# EAGLE board Panel (EAGLE 9.2.1), part 1 of 4
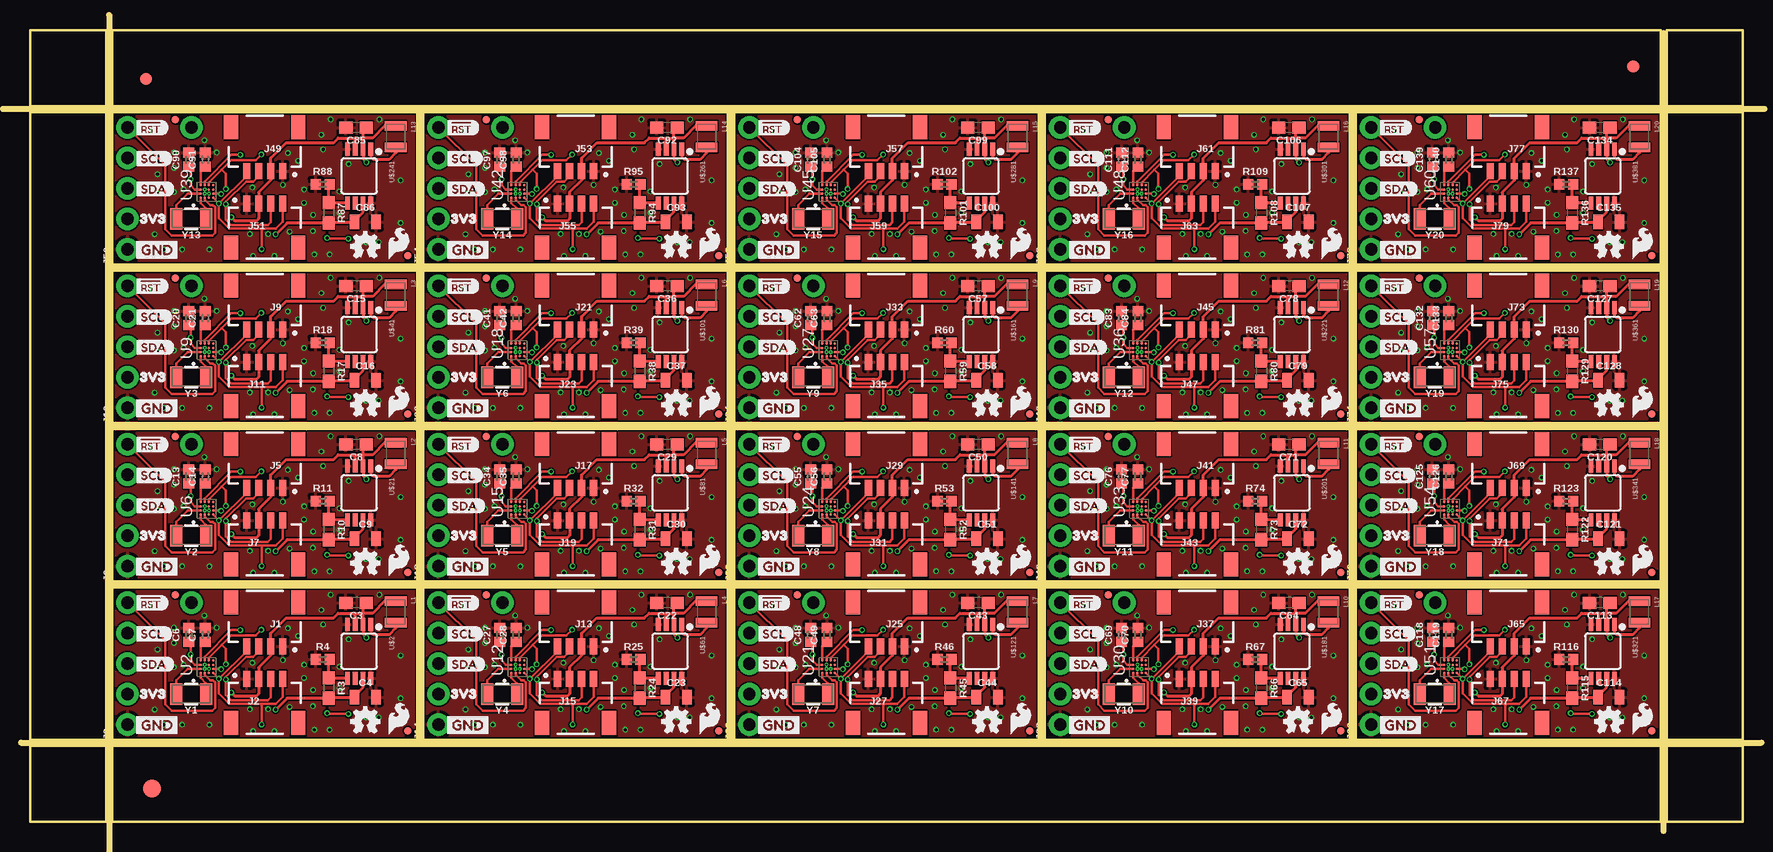
[diagram p0: board, top side]
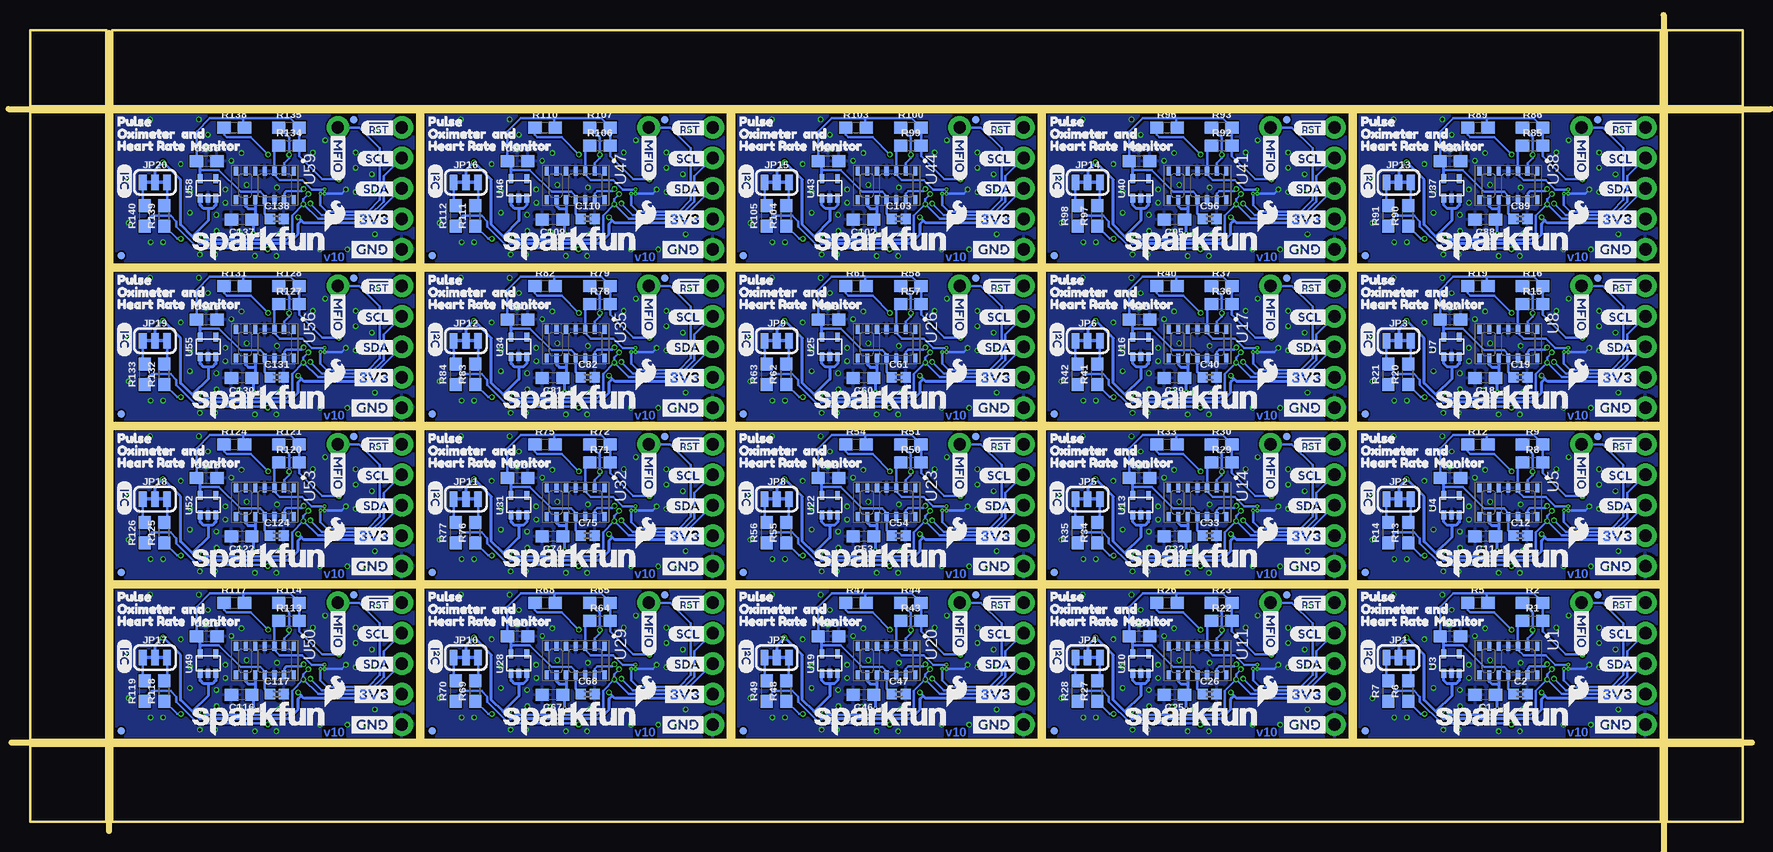
[diagram p1: board, bottom side, seen from below]

Size 142.75 x 66.04 mm. Coordinates in mm from the lower left corner, seen from the top.
Outline: 6.86,6.86 6.86,19.56 32.26,19.56 32.26,6.86 6.86,6.86
Outline: 6.86,20.07 6.86,32.77 32.26,32.77 32.26,20.07 6.86,20.07
Outline: 6.86,33.27 6.86,45.97 32.26,45.97 32.26,33.27 6.86,33.27
Outline: 32.77,6.86 32.77,19.56 58.17,19.56 58.17,6.86 32.77,6.86
Outline: 32.77,20.07 32.77,32.77 58.17,32.77 58.17,20.07 32.77,20.07
Outline: 32.77,33.27 32.77,45.97 58.17,45.97 58.17,33.27 32.77,33.27
Outline: 58.67,6.86 58.67,19.56 84.07,19.56 84.07,6.86 58.67,6.86
Outline: 58.67,20.07 58.67,32.77 84.07,32.77 84.07,20.07 58.67,20.07
Outline: 58.67,33.27 58.67,45.97 84.07,45.97 84.07,33.27 58.67,33.27
Outline: 84.58,6.86 84.58,19.56 109.98,19.56 109.98,6.86 84.58,6.86
Outline: 84.58,20.07 84.58,32.77 109.98,32.77 109.98,20.07 84.58,20.07
Outline: 84.58,33.27 84.58,45.97 109.98,45.97 109.98,33.27 84.58,33.27
Outline: 6.86,46.48 6.86,59.18 32.26,59.18 32.26,46.48 6.86,46.48
Outline: 32.77,46.48 32.77,59.18 58.17,59.18 58.17,46.48 32.77,46.48
Outline: 58.67,46.48 58.67,59.18 84.07,59.18 84.07,46.48 58.67,46.48
Outline: 84.58,46.48 84.58,59.18 109.98,59.18 109.98,46.48 84.58,46.48
Outline: 110.49,6.86 110.49,19.56 135.89,19.56 135.89,6.86 110.49,6.86
Outline: 110.49,20.07 110.49,32.77 135.89,32.77 135.89,20.07 110.49,20.07
Outline: 110.49,33.27 110.49,45.97 135.89,45.97 135.89,33.27 110.49,33.27
Outline: 110.49,46.48 110.49,59.18 135.89,59.18 135.89,46.48 110.49,46.48
Outline: 6.86,6.35 135.89,6.35 135.89,0 6.86,0 6.86,6.35
Outline: 136.4,6.86 136.4,59.18 142.75,59.18 142.75,6.86 136.4,6.86
Outline: 135.89,59.69 6.86,59.69 6.86,66.04 135.89,66.04 135.89,59.69
Outline: 6.35,59.18 6.35,6.86 0,6.86 0,59.18 6.35,59.18
Outline: 0,0 6.35,0 6.35,6.35 0,6.35 0,0
Outline: 136.4,0 142.75,0 142.75,6.35 136.4,6.35 136.4,0
Outline: 142.75,59.69 142.75,66.04 136.4,66.04 136.4,59.69 142.75,59.69
Outline: 6.35,66.04 0,66.04 0,59.69 6.35,59.69 6.35,66.04
Copper layers (1*2*15*16): Top 0.035559375mm / dielectric 0.47751875mm / Route2 0.035559375mm / dielectric 0.47751875mm / Route15 0.035559375mm / dielectric 0.47751875mm / Bottom 0.035559375mm
Design rules "SparkFun-4-layer-FAB-LIMIT *": minimum track width 4mil, minimum drill 6mil, track to track 5mil, track to pad 5mil, pad to pad 5mil, via to via 5mil, smd to smd 5mil, copper to edge 4mil, drill to drill 4mil, minimum pad ring 5mil, minimum via ring 4mil, stop-mask expansion 4mil, vias tented up to drill 25mil, thermal gap 10mil
Milling: 25 lines

## Footprints (pad centres in the part's own frame; a part is rotated, then mirrored left to right if it is on the bottom)
0603 = smd 1.1 x 1: 1 -0.85,0; 2 0.85,0
0402 = smd 0.85 x 0.9: 1 -0.58,0; 2 0.58,0
0805 = smd 0.8 x 1.2: 1 -0.9,0; 2 0.9,0
FIDUCIAL-1X2 = smd 1 x 1: 1 0,0
FIDUCIAL-1.5X3 = smd 1.5 x 1.5: 1 0,0
FIDUCIAL-MICRO = smd 0.635 x 0.635: 1 0,0
JST04_1MM_RA = smd 0.6 x 1.35: 1 -1.5,0; 2 -0.5,0; 3 0.5,0; 4 1.5,0 | smd 1.2 x 2: NC1 2.8,-3.675; NC2 -2.8,-3.675
1X05_NO_SILK = drill 1.016 pad 1.88: 1 0,0; 2 2.54,0; 3 5.08,0; 4 7.62,0; 5 10.16,0
1X01_NO_SILK = drill 1.016 pad 1.88: 1 0,0
SMT-JUMPER_3_2-NC_TRACE_SILK = smd 0.635 x 1.27: 1 -1.016,0; 2 0,0; 3 1.016,0
0806 = smd 0.8 x 1.8: 1 -0.9,0; 2 0.9,0
14_PIN_OESIP = smd 0.75 x 0.35: P1 -1.193,2.409; P2 -1.193,1.609; P3 -1.193,0.809; P4 -1.193,0.009; P5 -1.193,-0.791; P6 -1.193,-1.591; P7 -1.193,-2.391; P8 1.207,-2.391; P9 1.207,-1.591; P10 1.207,-0.791; P11 1.207,0.009; P12 1.207,0.809; P13 1.207,1.609; P14 1.207,2.409
16_PIN_WLP = smd 0.22 x 0.22: 1 -0.532,0.518; 2 -0.182,0.518; 3 0.168,0.518; 4 0.518,0.518; 5 0.518,0.168; 6 0.518,-0.182; 7 0.518,-0.532; 8 0.168,-0.532; 9 -0.182,-0.532; 10 -0.532,-0.532; 11 -0.532,-0.182; 12 -0.532,0.168; 13 -0.182,0.168; 14 0.168,0.168; 15 0.168,-0.182; 16 -0.182,-0.182
SC70 = smd 0.4 x 0.75: 1 -0.65,-0.825; 2 0,-0.825; 3 0.65,-0.825; 4 0.65,0.825; 5 -0.65,0.825
MSOP8 = smd 0.4 x 1.1: 1 -0.975,-2.25; 2 -0.325,-2.25; 3 0.325,-2.25; 4 0.975,-2.25; 5 0.975,2.25; 6 0.325,2.25; 7 -0.325,2.25; 8 -0.975,2.25
CRYSTAL-SMD-3.2X1.5MM = smd 1 x 1.8: P$1 -1.25,0; P$2 1.25,0

## Placement (x,y rotation side)
C1  10uF  [0603]  21.48,10.62 180 bottom
C2  0.1uF  [0402]  18.54,10.67 0 bottom
C3  10uF  [0603]  27.18,18.29 180 top
C4  22uF  [0805]  27.94,10.41 0 top
C5  1.0uF  [0603]  24.38,15.49 0 bottom
C6  1.0uF  [0402]  13.24,15.6 90 top
C7  1.0uF  [0402]  14.61,15.6 90 top
C8  10uF  [0603]  27.18,31.5 180 top
C9  22uF  [0805]  27.94,23.62 0 top
C10  1.0uF  [0603]  24.38,28.7 0 bottom
C11  10uF  [0603]  21.48,23.83 180 bottom
C12  0.1uF  [0402]  18.54,23.88 0 bottom
C13  1.0uF  [0402]  13.24,28.81 90 top
C14  1.0uF  [0402]  14.61,28.8 90 top
C15  10uF  [0603]  27.18,44.7 180 top
C16  22uF  [0805]  27.94,36.83 0 top
C17  1.0uF  [0603]  24.38,41.91 0 bottom
C18  10uF  [0603]  21.48,37.04 180 bottom
C19  0.1uF  [0402]  18.54,37.08 0 bottom
C20  1.0uF  [0402]  13.24,42.02 90 top
C21  1.0uF  [0402]  14.61,42.01 90 top
C22  10uF  [0603]  53.09,18.29 180 top
C23  22uF  [0805]  53.85,10.41 0 top
C24  1.0uF  [0603]  50.29,15.49 0 bottom
C25  10uF  [0603]  47.39,10.62 180 bottom
C26  0.1uF  [0402]  44.45,10.67 0 bottom
C27  1.0uF  [0402]  39.15,15.6 90 top
C28  1.0uF  [0402]  40.51,15.6 90 top
C29  10uF  [0603]  53.09,31.5 180 top
C30  22uF  [0805]  53.85,23.62 0 top
C31  1.0uF  [0603]  50.29,28.7 0 bottom
C32  10uF  [0603]  47.39,23.83 180 bottom
C33  0.1uF  [0402]  44.45,23.88 0 bottom
C34  1.0uF  [0402]  39.15,28.81 90 top
C35  1.0uF  [0402]  40.51,28.8 90 top
C36  10uF  [0603]  53.09,44.7 180 top
C37  22uF  [0805]  53.85,36.83 0 top
C38  1.0uF  [0603]  50.29,41.91 0 bottom
C39  10uF  [0603]  47.39,37.04 180 bottom
C40  0.1uF  [0402]  44.45,37.08 0 bottom
C41  1.0uF  [0402]  39.15,42.02 90 top
C42  1.0uF  [0402]  40.51,42.01 90 top
C43  10uF  [0603]  78.99,18.29 180 top
C44  22uF  [0805]  79.76,10.41 0 top
C45  1.0uF  [0603]  76.2,15.49 0 bottom
C46  10uF  [0603]  73.3,10.62 180 bottom
C47  0.1uF  [0402]  70.36,10.67 0 bottom
C48  1.0uF  [0402]  65.05,15.6 90 top
C49  1.0uF  [0402]  66.42,15.6 90 top
C50  10uF  [0603]  78.99,31.5 180 top
C51  22uF  [0805]  79.76,23.62 0 top
C52  1.0uF  [0603]  76.2,28.7 0 bottom
C53  10uF  [0603]  73.3,23.83 180 bottom
C54  0.1uF  [0402]  70.36,23.88 0 bottom
C55  1.0uF  [0402]  65.05,28.81 90 top
C56  1.0uF  [0402]  66.42,28.8 90 top
C57  10uF  [0603]  78.99,44.7 180 top
C58  22uF  [0805]  79.76,36.83 0 top
C59  1.0uF  [0603]  76.2,41.91 0 bottom
C60  10uF  [0603]  73.3,37.04 180 bottom
C61  0.1uF  [0402]  70.36,37.08 0 bottom
C62  1.0uF  [0402]  65.05,42.02 90 top
C63  1.0uF  [0402]  66.42,42.01 90 top
C64  10uF  [0603]  104.9,18.29 180 top
C65  22uF  [0805]  105.66,10.41 0 top
C66  1.0uF  [0603]  102.11,15.49 0 bottom
C67  10uF  [0603]  99.2,10.62 180 bottom
C68  0.1uF  [0402]  96.27,10.67 0 bottom
C69  1.0uF  [0402]  90.96,15.6 90 top
C70  1.0uF  [0402]  92.33,15.6 90 top
C71  10uF  [0603]  104.9,31.5 180 top
C72  22uF  [0805]  105.66,23.62 0 top
C73  1.0uF  [0603]  102.11,28.7 0 bottom
C74  10uF  [0603]  99.2,23.83 180 bottom
C75  0.1uF  [0402]  96.27,23.88 0 bottom
C76  1.0uF  [0402]  90.96,28.81 90 top
C77  1.0uF  [0402]  92.33,28.8 90 top
C78  10uF  [0603]  104.9,44.7 180 top
C79  22uF  [0805]  105.66,36.83 0 top
C80  1.0uF  [0603]  102.11,41.91 0 bottom
C81  10uF  [0603]  99.2,37.04 180 bottom
C82  0.1uF  [0402]  96.27,37.08 0 bottom
C83  1.0uF  [0402]  90.96,42.02 90 top
C84  1.0uF  [0402]  92.33,42.01 90 top
C85  10uF  [0603]  27.18,57.91 180 top
C86  22uF  [0805]  27.94,50.04 0 top
C87  1.0uF  [0603]  24.38,55.12 0 bottom
C88  10uF  [0603]  21.48,50.24 180 bottom
C89  0.1uF  [0402]  18.54,50.29 0 bottom
C90  1.0uF  [0402]  13.24,55.22 90 top
C91  1.0uF  [0402]  14.61,55.22 90 top
C92  10uF  [0603]  53.09,57.91 180 top
C93  22uF  [0805]  53.85,50.04 0 top
C94  1.0uF  [0603]  50.29,55.12 0 bottom
C95  10uF  [0603]  47.39,50.24 180 bottom
C96  0.1uF  [0402]  44.45,50.29 0 bottom
C97  1.0uF  [0402]  39.15,55.22 90 top
C98  1.0uF  [0402]  40.51,55.22 90 top
C99  10uF  [0603]  78.99,57.91 180 top
C100  22uF  [0805]  79.76,50.04 0 top
C101  1.0uF  [0603]  76.2,55.12 0 bottom
C102  10uF  [0603]  73.3,50.24 180 bottom
C103  0.1uF  [0402]  70.36,50.29 0 bottom
C104  1.0uF  [0402]  65.05,55.22 90 top
C105  1.0uF  [0402]  66.42,55.22 90 top
C106  10uF  [0603]  104.9,57.91 180 top
C107  22uF  [0805]  105.66,50.04 0 top
C108  1.0uF  [0603]  102.11,55.12 0 bottom
C109  10uF  [0603]  99.2,50.24 180 bottom
C110  0.1uF  [0402]  96.27,50.29 0 bottom
C111  1.0uF  [0402]  90.96,55.22 90 top
C112  1.0uF  [0402]  92.33,55.22 90 top
C113  10uF  [0603]  130.81,18.29 180 top
C114  22uF  [0805]  131.57,10.41 0 top
C115  1.0uF  [0603]  128.02,15.49 0 bottom
C116  10uF  [0603]  125.11,10.62 180 bottom
C117  0.1uF  [0402]  122.17,10.67 0 bottom
C118  1.0uF  [0402]  116.87,15.6 90 top
C119  1.0uF  [0402]  118.24,15.6 90 top
C120  10uF  [0603]  130.81,31.5 180 top
C121  22uF  [0805]  131.57,23.62 0 top
C122  1.0uF  [0603]  128.02,28.7 0 bottom
C123  10uF  [0603]  125.11,23.83 180 bottom
C124  0.1uF  [0402]  122.17,23.88 0 bottom
C125  1.0uF  [0402]  116.87,28.81 90 top
C126  1.0uF  [0402]  118.24,28.8 90 top
C127  10uF  [0603]  130.81,44.7 180 top
C128  22uF  [0805]  131.57,36.83 0 top
C129  1.0uF  [0603]  128.02,41.91 0 bottom
C130  10uF  [0603]  125.11,37.04 180 bottom
C131  0.1uF  [0402]  122.17,37.08 0 bottom
C132  1.0uF  [0402]  116.87,42.02 90 top
C133  1.0uF  [0402]  118.24,42.01 90 top
C134  10uF  [0603]  130.81,57.91 180 top
C135  22uF  [0805]  131.57,50.04 0 top
C136  1.0uF  [0603]  128.02,55.12 0 bottom
C137  10uF  [0603]  125.11,50.24 180 bottom
C138  0.1uF  [0402]  122.17,50.29 0 bottom
C139  1.0uF  [0402]  116.87,55.22 90 top
C140  1.0uF  [0402]  118.24,55.22 90 top
E$1  [FIDUCIAL-1X2]  9.65,61.98 0 top
E$2  [FIDUCIAL-1X2]  133.6,62.99 0 top
E$3  [FIDUCIAL-1.5X3]  10.16,2.79 0 top
FD1  FIDUCIALUFIDUCIAL  [FIDUCIAL-MICRO]  12.12,18.94 0 bottom
FD2  FIDUCIALUFIDUCIAL  [FIDUCIAL-MICRO]  12.12,18.94 0 top
FD3  FIDUCIALUFIDUCIAL  [FIDUCIAL-MICRO]  31.5,7.62 0 bottom
FD4  FIDUCIALUFIDUCIAL  [FIDUCIAL-MICRO]  31.5,7.62 0 top
FD5  FIDUCIALUFIDUCIAL  [FIDUCIAL-MICRO]  12.12,32.15 0 bottom
FD6  FIDUCIALUFIDUCIAL  [FIDUCIAL-MICRO]  12.12,32.15 0 top
FD7  FIDUCIALUFIDUCIAL  [FIDUCIAL-MICRO]  31.5,20.83 0 bottom
FD8  FIDUCIALUFIDUCIAL  [FIDUCIAL-MICRO]  31.5,20.83 0 top
FD9  FIDUCIALUFIDUCIAL  [FIDUCIAL-MICRO]  12.12,45.36 0 bottom
FD10  FIDUCIALUFIDUCIAL  [FIDUCIAL-MICRO]  12.12,45.36 0 top
FD11  FIDUCIALUFIDUCIAL  [FIDUCIAL-MICRO]  31.5,34.04 0 bottom
FD12  FIDUCIALUFIDUCIAL  [FIDUCIAL-MICRO]  31.5,34.04 0 top
FD13  FIDUCIALUFIDUCIAL  [FIDUCIAL-MICRO]  38.03,18.94 0 bottom
FD14  FIDUCIALUFIDUCIAL  [FIDUCIAL-MICRO]  38.03,18.94 0 top
FD15  FIDUCIALUFIDUCIAL  [FIDUCIAL-MICRO]  57.4,7.62 0 bottom
FD16  FIDUCIALUFIDUCIAL  [FIDUCIAL-MICRO]  57.4,7.62 0 top
FD17  FIDUCIALUFIDUCIAL  [FIDUCIAL-MICRO]  38.03,32.15 0 bottom
FD18  FIDUCIALUFIDUCIAL  [FIDUCIAL-MICRO]  38.03,32.15 0 top
FD19  FIDUCIALUFIDUCIAL  [FIDUCIAL-MICRO]  57.4,20.83 0 bottom
FD20  FIDUCIALUFIDUCIAL  [FIDUCIAL-MICRO]  57.4,20.83 0 top
FD21  FIDUCIALUFIDUCIAL  [FIDUCIAL-MICRO]  38.03,45.36 0 bottom
FD22  FIDUCIALUFIDUCIAL  [FIDUCIAL-MICRO]  38.03,45.36 0 top
FD23  FIDUCIALUFIDUCIAL  [FIDUCIAL-MICRO]  57.4,34.04 0 bottom
FD24  FIDUCIALUFIDUCIAL  [FIDUCIAL-MICRO]  57.4,34.04 0 top
FD25  FIDUCIALUFIDUCIAL  [FIDUCIAL-MICRO]  63.94,18.94 0 bottom
FD26  FIDUCIALUFIDUCIAL  [FIDUCIAL-MICRO]  63.94,18.94 0 top
FD27  FIDUCIALUFIDUCIAL  [FIDUCIAL-MICRO]  83.31,7.62 0 bottom
FD28  FIDUCIALUFIDUCIAL  [FIDUCIAL-MICRO]  83.31,7.62 0 top
FD29  FIDUCIALUFIDUCIAL  [FIDUCIAL-MICRO]  63.94,32.15 0 bottom
FD30  FIDUCIALUFIDUCIAL  [FIDUCIAL-MICRO]  63.94,32.15 0 top
FD31  FIDUCIALUFIDUCIAL  [FIDUCIAL-MICRO]  83.31,20.83 0 bottom
FD32  FIDUCIALUFIDUCIAL  [FIDUCIAL-MICRO]  83.31,20.83 0 top
FD33  FIDUCIALUFIDUCIAL  [FIDUCIAL-MICRO]  63.94,45.36 0 bottom
FD34  FIDUCIALUFIDUCIAL  [FIDUCIAL-MICRO]  63.94,45.36 0 top
FD35  FIDUCIALUFIDUCIAL  [FIDUCIAL-MICRO]  83.31,34.04 0 bottom
FD36  FIDUCIALUFIDUCIAL  [FIDUCIAL-MICRO]  83.31,34.04 0 top
FD37  FIDUCIALUFIDUCIAL  [FIDUCIAL-MICRO]  89.84,18.94 0 bottom
FD38  FIDUCIALUFIDUCIAL  [FIDUCIAL-MICRO]  89.85,18.94 0 top
FD39  FIDUCIALUFIDUCIAL  [FIDUCIAL-MICRO]  109.22,7.62 0 bottom
FD40  FIDUCIALUFIDUCIAL  [FIDUCIAL-MICRO]  109.22,7.62 0 top
FD41  FIDUCIALUFIDUCIAL  [FIDUCIAL-MICRO]  89.84,32.15 0 bottom
FD42  FIDUCIALUFIDUCIAL  [FIDUCIAL-MICRO]  89.85,32.15 0 top
FD43  FIDUCIALUFIDUCIAL  [FIDUCIAL-MICRO]  109.22,20.83 0 bottom
FD44  FIDUCIALUFIDUCIAL  [FIDUCIAL-MICRO]  109.22,20.83 0 top
FD45  FIDUCIALUFIDUCIAL  [FIDUCIAL-MICRO]  89.84,45.36 0 bottom
FD46  FIDUCIALUFIDUCIAL  [FIDUCIAL-MICRO]  89.85,45.36 0 top
FD47  FIDUCIALUFIDUCIAL  [FIDUCIAL-MICRO]  109.22,34.04 0 bottom
FD48  FIDUCIALUFIDUCIAL  [FIDUCIAL-MICRO]  109.22,34.04 0 top
FD49  FIDUCIALUFIDUCIAL  [FIDUCIAL-MICRO]  12.12,58.56 0 bottom
FD50  FIDUCIALUFIDUCIAL  [FIDUCIAL-MICRO]  12.12,58.56 0 top
FD51  FIDUCIALUFIDUCIAL  [FIDUCIAL-MICRO]  31.5,47.24 0 bottom
FD52  FIDUCIALUFIDUCIAL  [FIDUCIAL-MICRO]  31.5,47.24 0 top
FD53  FIDUCIALUFIDUCIAL  [FIDUCIAL-MICRO]  38.03,58.56 0 bottom
FD54  FIDUCIALUFIDUCIAL  [FIDUCIAL-MICRO]  38.03,58.56 0 top
FD55  FIDUCIALUFIDUCIAL  [FIDUCIAL-MICRO]  57.4,47.24 0 bottom
FD56  FIDUCIALUFIDUCIAL  [FIDUCIAL-MICRO]  57.4,47.24 0 top
FD57  FIDUCIALUFIDUCIAL  [FIDUCIAL-MICRO]  63.94,58.56 0 bottom
FD58  FIDUCIALUFIDUCIAL  [FIDUCIAL-MICRO]  63.94,58.56 0 top
FD59  FIDUCIALUFIDUCIAL  [FIDUCIAL-MICRO]  83.31,47.24 0 bottom
FD60  FIDUCIALUFIDUCIAL  [FIDUCIAL-MICRO]  83.31,47.24 0 top
FD61  FIDUCIALUFIDUCIAL  [FIDUCIAL-MICRO]  89.84,58.56 0 bottom
FD62  FIDUCIALUFIDUCIAL  [FIDUCIAL-MICRO]  89.85,58.56 0 top
FD63  FIDUCIALUFIDUCIAL  [FIDUCIAL-MICRO]  109.22,47.24 0 bottom
FD64  FIDUCIALUFIDUCIAL  [FIDUCIAL-MICRO]  109.22,47.24 0 top
FD65  FIDUCIALUFIDUCIAL  [FIDUCIAL-MICRO]  115.75,18.94 0 bottom
FD66  FIDUCIALUFIDUCIAL  [FIDUCIAL-MICRO]  115.76,18.94 0 top
FD67  FIDUCIALUFIDUCIAL  [FIDUCIAL-MICRO]  135.13,7.62 0 bottom
FD68  FIDUCIALUFIDUCIAL  [FIDUCIAL-MICRO]  135.13,7.62 0 top
FD69  FIDUCIALUFIDUCIAL  [FIDUCIAL-MICRO]  115.75,32.15 0 bottom
FD70  FIDUCIALUFIDUCIAL  [FIDUCIAL-MICRO]  115.76,32.15 0 top
FD71  FIDUCIALUFIDUCIAL  [FIDUCIAL-MICRO]  135.13,20.83 0 bottom
FD72  FIDUCIALUFIDUCIAL  [FIDUCIAL-MICRO]  135.13,20.83 0 top
FD73  FIDUCIALUFIDUCIAL  [FIDUCIAL-MICRO]  115.75,45.36 0 bottom
FD74  FIDUCIALUFIDUCIAL  [FIDUCIAL-MICRO]  115.76,45.36 0 top
FD75  FIDUCIALUFIDUCIAL  [FIDUCIAL-MICRO]  135.13,34.04 0 bottom
FD76  FIDUCIALUFIDUCIAL  [FIDUCIAL-MICRO]  135.13,34.04 0 top
FD77  FIDUCIALUFIDUCIAL  [FIDUCIAL-MICRO]  115.75,58.56 0 bottom
FD78  FIDUCIALUFIDUCIAL  [FIDUCIAL-MICRO]  115.76,58.56 0 top
FD79  FIDUCIALUFIDUCIAL  [FIDUCIAL-MICRO]  135.13,47.24 0 bottom
FD80  FIDUCIALUFIDUCIAL  [FIDUCIAL-MICRO]  135.13,47.24 0 top
J1  [JST04_1MM_RA]  19.56,14.66 180 top
J2  [JST04_1MM_RA]  19.56,11.94 0 top
J3  [1X05_NO_SILK]  8.13,8.13 90 top
J4  [1X01_NO_SILK]  13.46,18.29 0 top
J5  [JST04_1MM_RA]  19.56,27.86 180 top
J6  [1X05_NO_SILK]  8.13,21.34 90 top
J7  [JST04_1MM_RA]  19.56,25.15 0 top
J8  [1X01_NO_SILK]  13.46,31.5 0 top
J9  [JST04_1MM_RA]  19.56,41.07 180 top
J10  [1X05_NO_SILK]  8.13,34.54 90 top
J11  [JST04_1MM_RA]  19.56,38.35 0 top
J12  [1X01_NO_SILK]  13.46,44.7 0 top
J13  [JST04_1MM_RA]  45.47,14.66 180 top
J14  [1X05_NO_SILK]  34.04,8.13 90 top
J15  [JST04_1MM_RA]  45.47,11.94 0 top
J16  [1X01_NO_SILK]  39.37,18.29 0 top
J17  [JST04_1MM_RA]  45.47,27.86 180 top
J18  [1X05_NO_SILK]  34.04,21.34 90 top
J19  [JST04_1MM_RA]  45.47,25.15 0 top
J20  [1X01_NO_SILK]  39.37,31.5 0 top
J21  [JST04_1MM_RA]  45.47,41.07 180 top
J22  [1X05_NO_SILK]  34.04,34.54 90 top
J23  [JST04_1MM_RA]  45.47,38.35 0 top
J24  [1X01_NO_SILK]  39.37,44.7 0 top
J25  [JST04_1MM_RA]  71.37,14.66 180 top
J26  [1X05_NO_SILK]  59.94,8.13 90 top
J27  [JST04_1MM_RA]  71.37,11.94 0 top
J28  [1X01_NO_SILK]  65.28,18.29 0 top
J29  [JST04_1MM_RA]  71.37,27.86 180 top
J30  [1X05_NO_SILK]  59.94,21.34 90 top
J31  [JST04_1MM_RA]  71.37,25.15 0 top
J32  [1X01_NO_SILK]  65.28,31.5 0 top
J33  [JST04_1MM_RA]  71.37,41.07 180 top
J34  [1X05_NO_SILK]  59.94,34.54 90 top
J35  [JST04_1MM_RA]  71.37,38.35 0 top
J36  [1X01_NO_SILK]  65.28,44.7 0 top
J37  [JST04_1MM_RA]  97.28,14.66 180 top
J38  [1X05_NO_SILK]  85.85,8.13 90 top
J39  [JST04_1MM_RA]  97.28,11.94 0 top
J40  [1X01_NO_SILK]  91.19,18.29 0 top
J41  [JST04_1MM_RA]  97.28,27.86 180 top
J42  [1X05_NO_SILK]  85.85,21.34 90 top
J43  [JST04_1MM_RA]  97.28,25.15 0 top
J44  [1X01_NO_SILK]  91.19,31.5 0 top
J45  [JST04_1MM_RA]  97.28,41.07 180 top
J46  [1X05_NO_SILK]  85.85,34.54 90 top
J47  [JST04_1MM_RA]  97.28,38.35 0 top
J48  [1X01_NO_SILK]  91.19,44.7 0 top
J49  [JST04_1MM_RA]  19.56,54.28 180 top
J50  [1X05_NO_SILK]  8.13,47.75 90 top
J51  [JST04_1MM_RA]  19.56,51.56 0 top
J52  [1X01_NO_SILK]  13.46,57.91 0 top
J53  [JST04_1MM_RA]  45.47,54.28 180 top
J54  [1X05_NO_SILK]  34.04,47.75 90 top
J55  [JST04_1MM_RA]  45.47,51.56 0 top
J56  [1X01_NO_SILK]  39.37,57.91 0 top
J57  [JST04_1MM_RA]  71.37,54.28 180 top
J58  [1X05_NO_SILK]  59.94,47.75 90 top
J59  [JST04_1MM_RA]  71.37,51.56 0 top
J60  [1X01_NO_SILK]  65.28,57.91 0 top
J61  [JST04_1MM_RA]  97.28,54.28 180 top
J62  [1X05_NO_SILK]  85.85,47.75 90 top
J63  [JST04_1MM_RA]  97.28,51.56 0 top
J64  [1X01_NO_SILK]  91.19,57.91 0 top
J65  [JST04_1MM_RA]  123.19,14.66 180 top
J66  [1X05_NO_SILK]  111.76,8.13 90 top
J67  [JST04_1MM_RA]  123.19,11.94 0 top
J68  [1X01_NO_SILK]  117.09,18.29 0 top
J69  [JST04_1MM_RA]  123.19,27.86 180 top
J70  [1X05_NO_SILK]  111.76,21.34 90 top
J71  [JST04_1MM_RA]  123.19,25.15 0 top
J72  [1X01_NO_SILK]  117.09,31.5 0 top
J73  [JST04_1MM_RA]  123.19,41.07 180 top
J74  [1X05_NO_SILK]  111.76,34.54 90 top
J75  [JST04_1MM_RA]  123.19,38.35 0 top
J76  [1X01_NO_SILK]  117.09,44.7 0 top
J77  [JST04_1MM_RA]  123.19,54.28 180 top
J78  [1X05_NO_SILK]  111.76,47.75 90 top
J79  [JST04_1MM_RA]  123.19,51.56 0 top
J80  [1X01_NO_SILK]  117.09,57.91 0 top
JP1  JUMPER-SMT_3_2-NC_TRACE_SILK  [SMT-JUMPER_3_2-NC_TRACE_SILK]  28.7,13.72 0 bottom
JP2  JUMPER-SMT_3_2-NC_TRACE_SILK  [SMT-JUMPER_3_2-NC_TRACE_SILK]  28.7,26.92 0 bottom
JP3  JUMPER-SMT_3_2-NC_TRACE_SILK  [SMT-JUMPER_3_2-NC_TRACE_SILK]  28.7,40.13 0 bottom
JP4  JUMPER-SMT_3_2-NC_TRACE_SILK  [SMT-JUMPER_3_2-NC_TRACE_SILK]  54.61,13.72 0 bottom
JP5  JUMPER-SMT_3_2-NC_TRACE_SILK  [SMT-JUMPER_3_2-NC_TRACE_SILK]  54.61,26.92 0 bottom
JP6  JUMPER-SMT_3_2-NC_TRACE_SILK  [SMT-JUMPER_3_2-NC_TRACE_SILK]  54.61,40.13 0 bottom
JP7  JUMPER-SMT_3_2-NC_TRACE_SILK  [SMT-JUMPER_3_2-NC_TRACE_SILK]  80.52,13.72 0 bottom
JP8  JUMPER-SMT_3_2-NC_TRACE_SILK  [SMT-JUMPER_3_2-NC_TRACE_SILK]  80.52,26.92 0 bottom
JP9  JUMPER-SMT_3_2-NC_TRACE_SILK  [SMT-JUMPER_3_2-NC_TRACE_SILK]  80.52,40.13 0 bottom
JP10  JUMPER-SMT_3_2-NC_TRACE_SILK  [SMT-JUMPER_3_2-NC_TRACE_SILK]  106.43,13.72 0 bottom
JP11  JUMPER-SMT_3_2-NC_TRACE_SILK  [SMT-JUMPER_3_2-NC_TRACE_SILK]  106.43,26.92 0 bottom
JP12  JUMPER-SMT_3_2-NC_TRACE_SILK  [SMT-JUMPER_3_2-NC_TRACE_SILK]  106.43,40.13 0 bottom
JP13  JUMPER-SMT_3_2-NC_TRACE_SILK  [SMT-JUMPER_3_2-NC_TRACE_SILK]  28.7,53.34 0 bottom
JP14  JUMPER-SMT_3_2-NC_TRACE_SILK  [SMT-JUMPER_3_2-NC_TRACE_SILK]  54.61,53.34 0 bottom
JP15  JUMPER-SMT_3_2-NC_TRACE_SILK  [SMT-JUMPER_3_2-NC_TRACE_SILK]  80.52,53.34 0 bottom
JP16  JUMPER-SMT_3_2-NC_TRACE_SILK  [SMT-JUMPER_3_2-NC_TRACE_SILK]  106.43,53.34 0 bottom
JP17  JUMPER-SMT_3_2-NC_TRACE_SILK  [SMT-JUMPER_3_2-NC_TRACE_SILK]  132.33,13.72 0 bottom
JP18  JUMPER-SMT_3_2-NC_TRACE_SILK  [SMT-JUMPER_3_2-NC_TRACE_SILK]  132.33,26.92 0 bottom
JP19  JUMPER-SMT_3_2-NC_TRACE_SILK  [SMT-JUMPER_3_2-NC_TRACE_SILK]  132.33,40.13 0 bottom
JP20  JUMPER-SMT_3_2-NC_TRACE_SILK  [SMT-JUMPER_3_2-NC_TRACE_SILK]  132.33,53.34 0 bottom
L1  2.2μH  [0806]  30.48,17.53 270 top
L2  2.2μH  [0806]  30.48,30.73 270 top
L3  2.2μH  [0806]  30.48,43.94 270 top
L4  2.2μH  [0806]  56.39,17.53 270 top
L5  2.2μH  [0806]  56.39,30.73 270 top
L6  2.2μH  [0806]  56.39,43.94 270 top
L7  2.2μH  [0806]  82.3,17.53 270 top
L8  2.2μH  [0806]  82.3,30.73 270 top
L9  2.2μH  [0806]  82.3,43.94 270 top
L10  2.2μH  [0806]  108.2,17.53 270 top
L11  2.2μH  [0806]  108.2,30.73 270 top
L12  2.2μH  [0806]  108.2,43.94 270 top
L13  2.2μH  [0806]  30.48,57.15 270 top
L14  2.2μH  [0806]  56.39,57.15 270 top
L15  2.2μH  [0806]  82.3,57.15 270 top
L16  2.2μH  [0806]  108.2,57.15 270 top
L17  2.2μH  [0806]  134.11,17.53 270 top
L18  2.2μH  [0806]  134.11,30.73 270 top
L19  2.2μH  [0806]  134.11,43.94 270 top
L20  2.2μH  [0806]  134.11,57.15 270 top
LOGO1  SFE_LOGO_FLAME.1_INCH  [SFE_LOGO_FLAME_.1]  30.73,8.64 0 top
LOGO2  OSHW-LOGOMINI  [OSHW-LOGO-MINI]  27.94,8.38 0 top
LOGO3  SFE_LOGO_NAME.1_INCH  [SFE_LOGO_NAME_.1]  20.07,8.64 0 bottom
LOGO4  SFE_LOGO_FLAME.1_INCH  [SFE_LOGO_FLAME_.1]  30.73,21.84 0 top
LOGO5  OSHW-LOGOMINI  [OSHW-LOGO-MINI]  27.94,21.59 0 top
LOGO6  SFE_LOGO_NAME.1_INCH  [SFE_LOGO_NAME_.1]  20.07,21.84 0 bottom
LOGO7  SFE_LOGO_FLAME.1_INCH  [SFE_LOGO_FLAME_.1]  30.73,35.05 0 top
LOGO8  OSHW-LOGOMINI  [OSHW-LOGO-MINI]  27.94,34.8 0 top
LOGO9  SFE_LOGO_NAME.1_INCH  [SFE_LOGO_NAME_.1]  20.07,35.05 0 bottom
LOGO10  SFE_LOGO_FLAME.1_INCH  [SFE_LOGO_FLAME_.1]  56.64,8.64 0 top
LOGO11  OSHW-LOGOMINI  [OSHW-LOGO-MINI]  53.85,8.38 0 top
LOGO12  SFE_LOGO_NAME.1_INCH  [SFE_LOGO_NAME_.1]  45.97,8.64 0 bottom
LOGO13  SFE_LOGO_FLAME.1_INCH  [SFE_LOGO_FLAME_.1]  56.64,21.84 0 top
LOGO14  OSHW-LOGOMINI  [OSHW-LOGO-MINI]  53.85,21.59 0 top
LOGO15  SFE_LOGO_NAME.1_INCH  [SFE_LOGO_NAME_.1]  45.97,21.84 0 bottom
LOGO16  SFE_LOGO_FLAME.1_INCH  [SFE_LOGO_FLAME_.1]  56.64,35.05 0 top
LOGO17  OSHW-LOGOMINI  [OSHW-LOGO-MINI]  53.85,34.8 0 top
LOGO18  SFE_LOGO_NAME.1_INCH  [SFE_LOGO_NAME_.1]  45.97,35.05 0 bottom
LOGO19  SFE_LOGO_FLAME.1_INCH  [SFE_LOGO_FLAME_.1]  82.55,8.64 0 top
LOGO20  OSHW-LOGOMINI  [OSHW-LOGO-MINI]  79.76,8.38 0 top
LOGO21  SFE_LOGO_NAME.1_INCH  [SFE_LOGO_NAME_.1]  71.88,8.64 0 bottom
LOGO22  SFE_LOGO_FLAME.1_INCH  [SFE_LOGO_FLAME_.1]  82.55,21.84 0 top
LOGO23  OSHW-LOGOMINI  [OSHW-LOGO-MINI]  79.76,21.59 0 top
LOGO24  SFE_LOGO_NAME.1_INCH  [SFE_LOGO_NAME_.1]  71.88,21.84 0 bottom
LOGO25  SFE_LOGO_FLAME.1_INCH  [SFE_LOGO_FLAME_.1]  82.55,35.05 0 top
LOGO26  OSHW-LOGOMINI  [OSHW-LOGO-MINI]  79.76,34.8 0 top
LOGO27  SFE_LOGO_NAME.1_INCH  [SFE_LOGO_NAME_.1]  71.88,35.05 0 bottom
LOGO28  SFE_LOGO_FLAME.1_INCH  [SFE_LOGO_FLAME_.1]  108.46,8.64 0 top
LOGO29  OSHW-LOGOMINI  [OSHW-LOGO-MINI]  105.66,8.38 0 top
LOGO30  SFE_LOGO_NAME.1_INCH  [SFE_LOGO_NAME_.1]  97.79,8.64 0 bottom
LOGO31  SFE_LOGO_FLAME.1_INCH  [SFE_LOGO_FLAME_.1]  108.46,21.84 0 top
LOGO32  OSHW-LOGOMINI  [OSHW-LOGO-MINI]  105.66,21.59 0 top
LOGO33  SFE_LOGO_NAME.1_INCH  [SFE_LOGO_NAME_.1]  97.79,21.84 0 bottom
LOGO34  SFE_LOGO_FLAME.1_INCH  [SFE_LOGO_FLAME_.1]  108.46,35.05 0 top
LOGO35  OSHW-LOGOMINI  [OSHW-LOGO-MINI]  105.66,34.8 0 top
LOGO36  SFE_LOGO_NAME.1_INCH  [SFE_LOGO_NAME_.1]  97.79,35.05 0 bottom
LOGO37  SFE_LOGO_FLAME.1_INCH  [SFE_LOGO_FLAME_.1]  30.73,48.26 0 top
LOGO38  OSHW-LOGOMINI  [OSHW-LOGO-MINI]  27.94,48.01 0 top
LOGO39  SFE_LOGO_NAME.1_INCH  [SFE_LOGO_NAME_.1]  20.07,48.26 0 bottom
LOGO40  SFE_LOGO_FLAME.1_INCH  [SFE_LOGO_FLAME_.1]  56.64,48.26 0 top
LOGO41  OSHW-LOGOMINI  [OSHW-LOGO-MINI]  53.85,48.01 0 top
LOGO42  SFE_LOGO_NAME.1_INCH  [SFE_LOGO_NAME_.1]  45.97,48.26 0 bottom
LOGO43  SFE_LOGO_FLAME.1_INCH  [SFE_LOGO_FLAME_.1]  82.55,48.26 0 top
LOGO44  OSHW-LOGOMINI  [OSHW-LOGO-MINI]  79.76,48.01 0 top
LOGO45  SFE_LOGO_NAME.1_INCH  [SFE_LOGO_NAME_.1]  71.88,48.26 0 bottom
LOGO46  SFE_LOGO_FLAME.1_INCH  [SFE_LOGO_FLAME_.1]  108.46,48.26 0 top
LOGO47  OSHW-LOGOMINI  [OSHW-LOGO-MINI]  105.66,48.01 0 top
LOGO48  SFE_LOGO_NAME.1_INCH  [SFE_LOGO_NAME_.1]  97.79,48.26 0 bottom
LOGO49  SFE_LOGO_FLAME.1_INCH  [SFE_LOGO_FLAME_.1]  134.37,8.64 0 top
LOGO50  OSHW-LOGOMINI  [OSHW-LOGO-MINI]  131.57,8.38 0 top
LOGO51  SFE_LOGO_NAME.1_INCH  [SFE_LOGO_NAME_.1]  123.7,8.64 0 bottom
LOGO52  SFE_LOGO_FLAME.1_INCH  [SFE_LOGO_FLAME_.1]  134.37,21.84 0 top
LOGO53  OSHW-LOGOMINI  [OSHW-LOGO-MINI]  131.57,21.59 0 top
LOGO54  SFE_LOGO_NAME.1_INCH  [SFE_LOGO_NAME_.1]  123.7,21.84 0 bottom
LOGO55  SFE_LOGO_FLAME.1_INCH  [SFE_LOGO_FLAME_.1]  134.37,35.05 0 top
LOGO56  OSHW-LOGOMINI  [OSHW-LOGO-MINI]  131.57,34.8 0 top
LOGO57  SFE_LOGO_NAME.1_INCH  [SFE_LOGO_NAME_.1]  123.7,35.05 0 bottom
LOGO58  SFE_LOGO_FLAME.1_INCH  [SFE_LOGO_FLAME_.1]  134.37,48.26 0 top
LOGO59  OSHW-LOGOMINI  [OSHW-LOGO-MINI]  131.57,48.01 0 top
LOGO60  SFE_LOGO_NAME.1_INCH  [SFE_LOGO_NAME_.1]  123.7,48.26 0 bottom
R1  4.7k  [0603]  17.53,16.76 0 bottom
R2  4.7k  [0603]  17.53,18.29 0 bottom
R3  750K  [0603]  24.89,11.18 270 top
R4  100K  [0402]  24.39,13.55 0 top
R5  4.7k  [0603]  22.1,18.29 0 bottom
R6  4.7k  [0603]  27.91,10.92 90 bottom
R7  4.7k  [0603]  29.54,10.92 90 bottom
R8  4.7k  [0603]  17.53,29.97 0 bottom
R9  4.7k  [0603]  17.53,31.5 0 bottom
R10  750K  [0603]  24.89,24.38 270 top
R11  100K  [0402]  24.39,26.76 0 top
R12  4.7k  [0603]  22.1,31.5 0 bottom
R13  4.7k  [0603]  27.91,24.13 90 bottom
R14  4.7k  [0603]  29.54,24.13 90 bottom
R15  4.7k  [0603]  17.53,43.18 0 bottom
R16  4.7k  [0603]  17.53,44.7 0 bottom
R17  750K  [0603]  24.89,37.59 270 top
R18  100K  [0402]  24.39,39.96 0 top
R19  4.7k  [0603]  22.1,44.7 0 bottom
R20  4.7k  [0603]  27.91,37.34 90 bottom
R21  4.7k  [0603]  29.54,37.34 90 bottom
R22  4.7k  [0603]  43.43,16.76 0 bottom
R23  4.7k  [0603]  43.43,18.29 0 bottom
R24  750K  [0603]  50.8,11.18 270 top
R25  100K  [0402]  50.3,13.55 0 top
R26  4.7k  [0603]  48.01,18.29 0 bottom
R27  4.7k  [0603]  53.82,10.92 90 bottom
R28  4.7k  [0603]  55.45,10.92 90 bottom
R29  4.7k  [0603]  43.43,29.97 0 bottom
R30  4.7k  [0603]  43.43,31.5 0 bottom
R31  750K  [0603]  50.8,24.38 270 top
R32  100K  [0402]  50.3,26.76 0 top
R33  4.7k  [0603]  48.01,31.5 0 bottom
R34  4.7k  [0603]  53.82,24.13 90 bottom
R35  4.7k  [0603]  55.45,24.13 90 bottom
R36  4.7k  [0603]  43.43,43.18 0 bottom
R37  4.7k  [0603]  43.43,44.7 0 bottom
R38  750K  [0603]  50.8,37.59 270 top
R39  100K  [0402]  50.3,39.96 0 top
R40  4.7k  [0603]  48.01,44.7 0 bottom
R41  4.7k  [0603]  53.82,37.34 90 bottom
R42  4.7k  [0603]  55.45,37.34 90 bottom
R43  4.7k  [0603]  69.34,16.76 0 bottom
R44  4.7k  [0603]  69.34,18.29 0 bottom
R45  750K  [0603]  76.71,11.18 270 top
R46  100K  [0402]  76.21,13.55 0 top
R47  4.7k  [0603]  73.91,18.29 0 bottom
R48  4.7k  [0603]  79.73,10.92 90 bottom
R49  4.7k  [0603]  81.36,10.92 90 bottom
R50  4.7k  [0603]  69.34,29.97 0 bottom
R51  4.7k  [0603]  69.34,31.5 0 bottom
R52  750K  [0603]  76.71,24.38 270 top
R53  100K  [0402]  76.21,26.76 0 top
R54  4.7k  [0603]  73.91,31.5 0 bottom
R55  4.7k  [0603]  79.73,24.13 90 bottom
R56  4.7k  [0603]  81.36,24.13 90 bottom
R57  4.7k  [0603]  69.34,43.18 0 bottom
R58  4.7k  [0603]  69.34,44.7 0 bottom
R59  750K  [0603]  76.71,37.59 270 top
R60  100K  [0402]  76.21,39.96 0 top
R61  4.7k  [0603]  73.91,44.7 0 bottom
R62  4.7k  [0603]  79.73,37.34 90 bottom
R63  4.7k  [0603]  81.36,37.34 90 bottom
R64  4.7k  [0603]  95.25,16.76 0 bottom
R65  4.7k  [0603]  95.25,18.29 0 bottom
R66  750K  [0603]  102.62,11.18 270 top
R67  100K  [0402]  102.11,13.55 0 top
R68  4.7k  [0603]  99.82,18.29 0 bottom
R69  4.7k  [0603]  105.64,10.92 90 bottom
R70  4.7k  [0603]  107.26,10.92 90 bottom
R71  4.7k  [0603]  95.25,29.97 0 bottom
R72  4.7k  [0603]  95.25,31.5 0 bottom
R73  750K  [0603]  102.62,24.38 270 top
R74  100K  [0402]  102.11,26.76 0 top
R75  4.7k  [0603]  99.82,31.5 0 bottom
R76  4.7k  [0603]  105.64,24.13 90 bottom
R77  4.7k  [0603]  107.26,24.13 90 bottom
R78  4.7k  [0603]  95.25,43.18 0 bottom
R79  4.7k  [0603]  95.25,44.7 0 bottom
R80  750K  [0603]  102.62,37.59 270 top
R81  100K  [0402]  102.11,39.96 0 top
R82  4.7k  [0603]  99.82,44.7 0 bottom
R83  4.7k  [0603]  105.64,37.34 90 bottom
R84  4.7k  [0603]  107.26,37.34 90 bottom
R85  4.7k  [0603]  17.53,56.39 0 bottom
R86  4.7k  [0603]  17.53,57.91 0 bottom
R87  750K  [0603]  24.89,50.8 270 top
R88  100K  [0402]  24.39,53.17 0 top
R89  4.7k  [0603]  22.1,57.91 0 bottom
R90  4.7k  [0603]  27.91,50.55 90 bottom
R91  4.7k  [0603]  29.54,50.55 90 bottom
R92  4.7k  [0603]  43.43,56.39 0 bottom
R93  4.7k  [0603]  43.43,57.91 0 bottom
R94  750K  [0603]  50.8,50.8 270 top
R95  100K  [0402]  50.3,53.17 0 top
R96  4.7k  [0603]  48.01,57.91 0 bottom
R97  4.7k  [0603]  53.82,50.55 90 bottom
R98  4.7k  [0603]  55.45,50.55 90 bottom
R99  4.7k  [0603]  69.34,56.39 0 bottom
R100  4.7k  [0603]  69.34,57.91 0 bottom
R101  750K  [0603]  76.71,50.8 270 top
R102  100K  [0402]  76.21,53.17 0 top
R103  4.7k  [0603]  73.91,57.91 0 bottom
R104  4.7k  [0603]  79.73,50.55 90 bottom
R105  4.7k  [0603]  81.36,50.55 90 bottom
R106  4.7k  [0603]  95.25,56.39 0 bottom
R107  4.7k  [0603]  95.25,57.91 0 bottom
R108  750K  [0603]  102.62,50.8 270 top
R109  100K  [0402]  102.11,53.17 0 top
R110  4.7k  [0603]  99.82,57.91 0 bottom
R111  4.7k  [0603]  105.64,50.55 90 bottom
R112  4.7k  [0603]  107.26,50.55 90 bottom
R113  4.7k  [0603]  121.16,16.76 0 bottom
R114  4.7k  [0603]  121.16,18.29 0 bottom
R115  750K  [0603]  128.52,11.18 270 top
R116  100K  [0402]  128.02,13.55 0 top
R117  4.7k  [0603]  125.73,18.29 0 bottom
R118  4.7k  [0603]  131.55,10.92 90 bottom
R119  4.7k  [0603]  133.17,10.92 90 bottom
R120  4.7k  [0603]  121.16,29.97 0 bottom
R121  4.7k  [0603]  121.16,31.5 0 bottom
R122  750K  [0603]  128.52,24.38 270 top
R123  100K  [0402]  128.02,26.76 0 top
R124  4.7k  [0603]  125.73,31.5 0 bottom
R125  4.7k  [0603]  131.55,24.13 90 bottom
R126  4.7k  [0603]  133.17,24.13 90 bottom
R127  4.7k  [0603]  121.16,43.18 0 bottom
R128  4.7k  [0603]  121.16,44.7 0 bottom
R129  750K  [0603]  128.52,37.59 270 top
R130  100K  [0402]  128.02,39.96 0 top
R131  4.7k  [0603]  125.73,44.7 0 bottom
R132  4.7k  [0603]  131.55,37.34 90 bottom
R133  4.7k  [0603]  133.17,37.34 90 bottom
R134  4.7k  [0603]  121.16,56.39 0 bottom
R135  4.7k  [0603]  121.16,57.91 0 bottom
R136  750K  [0603]  128.52,50.8 270 top
R137  100K  [0402]  128.02,53.17 0 top
R138  4.7k  [0603]  125.73,57.91 0 bottom
R139  4.7k  [0603]  131.55,50.55 90 bottom
R140  4.7k  [0603]  133.17,50.55 90 bottom
U1  MAX30101EFD  [14_PIN_OESIP]  19.56,13.46 270 bottom
U2  MAX32664GWEA  [16_PIN_WLP]  14.73,12.95 90 top
U3  1.8V/100mA  [SC70]  24.28,13.21 0 bottom
U4  1.8V/100mA  [SC70]  24.28,26.42 0 bottom
U5  MAX30101EFD  [14_PIN_OESIP]  19.56,26.67 270 bottom
U6  MAX32664GWEA  [16_PIN_WLP]  14.73,26.16 90 top
U7  1.8V/100mA  [SC70]  24.28,39.62 0 bottom
U8  MAX30101EFD  [14_PIN_OESIP]  19.56,39.88 270 bottom
U9  MAX32664GWEA  [16_PIN_WLP]  14.73,39.37 90 top
U10  1.8V/100mA  [SC70]  50.19,13.21 0 bottom
U11  MAX30101EFD  [14_PIN_OESIP]  45.47,13.46 270 bottom
U12  MAX32664GWEA  [16_PIN_WLP]  40.64,12.95 90 top
U13  1.8V/100mA  [SC70]  50.19,26.42 0 bottom
U14  MAX30101EFD  [14_PIN_OESIP]  45.47,26.67 270 bottom
U15  MAX32664GWEA  [16_PIN_WLP]  40.64,26.16 90 top
U16  1.8V/100mA  [SC70]  50.19,39.62 0 bottom
U17  MAX30101EFD  [14_PIN_OESIP]  45.47,39.88 270 bottom
U18  MAX32664GWEA  [16_PIN_WLP]  40.64,39.37 90 top
U19  1.8V/100mA  [SC70]  76.1,13.21 0 bottom
U20  MAX30101EFD  [14_PIN_OESIP]  71.37,13.46 270 bottom
U21  MAX32664GWEA  [16_PIN_WLP]  66.55,12.95 90 top
U22  1.8V/100mA  [SC70]  76.1,26.42 0 bottom
U23  MAX30101EFD  [14_PIN_OESIP]  71.37,26.67 270 bottom
U24  MAX32664GWEA  [16_PIN_WLP]  66.55,26.16 90 top
U25  1.8V/100mA  [SC70]  76.1,39.62 0 bottom
U26  MAX30101EFD  [14_PIN_OESIP]  71.37,39.88 270 bottom
U27  MAX32664GWEA  [16_PIN_WLP]  66.55,39.37 90 top
U28  1.8V/100mA  [SC70]  102.01,13.21 0 bottom
U29  MAX30101EFD  [14_PIN_OESIP]  97.28,13.46 270 bottom
U30  MAX32664GWEA  [16_PIN_WLP]  92.46,12.95 90 top
U31  1.8V/100mA  [SC70]  102.01,26.42 0 bottom
U32  MAX30101EFD  [14_PIN_OESIP]  97.28,26.67 270 bottom
U33  MAX32664GWEA  [16_PIN_WLP]  92.46,26.16 90 top
U34  1.8V/100mA  [SC70]  102.01,39.62 0 bottom
U35  MAX30101EFD  [14_PIN_OESIP]  97.28,39.88 270 bottom
U36  MAX32664GWEA  [16_PIN_WLP]  92.46,39.37 90 top
U37  1.8V/100mA  [SC70]  24.28,52.83 0 bottom
U38  MAX30101EFD  [14_PIN_OESIP]  19.56,53.09 270 bottom
U39  MAX32664GWEA  [16_PIN_WLP]  14.73,52.58 90 top
U40  1.8V/100mA  [SC70]  50.19,52.83 0 bottom
U41  MAX30101EFD  [14_PIN_OESIP]  45.47,53.09 270 bottom
U42  MAX32664GWEA  [16_PIN_WLP]  40.64,52.58 90 top
U43  1.8V/100mA  [SC70]  76.1,52.83 0 bottom
U44  MAX30101EFD  [14_PIN_OESIP]  71.37,53.09 270 bottom
U45  MAX32664GWEA  [16_PIN_WLP]  66.55,52.58 90 top
U46  1.8V/100mA  [SC70]  102.01,52.83 0 bottom
U47  MAX30101EFD  [14_PIN_OESIP]  97.28,53.09 270 bottom
U48  MAX32664GWEA  [16_PIN_WLP]  92.46,52.58 90 top
U49  1.8V/100mA  [SC70]  127.91,13.21 0 bottom
U50  MAX30101EFD  [14_PIN_OESIP]  123.19,13.46 270 bottom
U51  MAX32664GWEA  [16_PIN_WLP]  118.36,12.95 90 top
U52  1.8V/100mA  [SC70]  127.91,26.42 0 bottom
U53  MAX30101EFD  [14_PIN_OESIP]  123.19,26.67 270 bottom
U54  MAX32664GWEA  [16_PIN_WLP]  118.36,26.16 90 top
U55  1.8V/100mA  [SC70]  127.91,39.62 0 bottom
U56  MAX30101EFD  [14_PIN_OESIP]  123.19,39.88 270 bottom
U57  MAX32664GWEA  [16_PIN_WLP]  118.36,39.37 90 top
U58  1.8V/100mA  [SC70]  127.91,52.83 0 bottom
U59  MAX30101EFD  [14_PIN_OESIP]  123.19,53.09 270 bottom
U60  MAX32664GWEA  [16_PIN_WLP]  118.36,52.58 90 top
U$1  [I_SUPER2_C-()-03]  31.24,15.24 270 bottom
U$2  PAM2401  [MSOP8]  27.43,14.22 180 top
U$3  [GND-03]  12.74,8.11 0 bottom
U$4  [SCL0]  8.54,15.69 0 top
U$5  [GND-03]  8.45,8.08 0 top
U$6  [#RST0]  8.42,18.27 0 top
U$7  [MFIO0]  13.45,17.93 270 bottom
U$8  [#RST0]  11.68,18.24 0 bottom
U$9  [SCL0]  11.86,15.69 0 bottom
U$10  [SDA0]  12.03,13.17 0 bottom
U$11  [GND-03]  8.48,8.11 180 bottom
U$12  [3V3-03]  12.53,10.64 0 bottom
U$13  [3V3-TEXT]  8.47,10.7 0 top
U$14  [OXIMETER0]  32.51,17.78 0 bottom
U$15  [HEART_RATE0]  32.51,16.76 0 bottom
U$16  [MONITOR0]  26.42,16.76 0 bottom
U$17  [PULSE0]  32.51,18.8 0 bottom
U$18  [AND0]  27.18,17.78 0 bottom
U$19  [SFE_LOGO_FLAME_.1]  13.72,10.92 0 bottom
U$20  [SDA0]  8.54,13.15 0 top
U$21  PAM2401  [MSOP8]  27.43,27.43 180 top
U$22  [I_SUPER2_C-()-03]  31.24,28.45 270 bottom
U$23  [GND-03]  12.74,21.32 0 bottom
U$24  [SCL0]  8.54,28.9 0 top
U$25  [MFIO0]  13.45,31.14 270 bottom
U$26  [GND-03]  8.48,21.32 180 bottom
U$27  [3V3-03]  12.53,23.85 0 bottom
U$28  [3V3-TEXT]  8.47,23.91 0 top
U$29  [OXIMETER0]  32.51,30.99 0 bottom
U$30  [HEART_RATE0]  32.51,29.97 0 bottom
U$31  [MONITOR0]  26.42,29.97 0 bottom
U$32  [PULSE0]  32.51,32 0 bottom
U$33  [AND0]  27.18,30.99 0 bottom
U$34  [SFE_LOGO_FLAME_.1]  13.72,24.13 0 bottom
U$35  [#RST0]  11.68,31.45 0 bottom
U$36  [SCL0]  11.86,28.9 0 bottom
U$37  [SDA0]  12.03,26.38 0 bottom
U$38  [#RST0]  8.42,31.47 0 top
U$39  [GND-03]  8.45,21.29 0 top
U$40  [SDA0]  8.54,26.36 0 top
U$41  PAM2401  [MSOP8]  27.43,40.64 180 top
U$42  [I_SUPER2_C-()-03]  31.24,41.66 270 bottom
U$43  [GND-03]  12.74,34.52 0 bottom
U$44  [SCL0]  8.54,42.11 0 top
U$45  [MFIO0]  13.45,44.35 270 bottom
U$46  [GND-03]  8.48,34.53 180 bottom
U$47  [3V3-03]  12.53,37.06 0 bottom
U$48  [3V3-TEXT]  8.47,37.11 0 top
U$49  [OXIMETER0]  32.51,44.2 0 bottom
U$50  [HEART_RATE0]  32.51,43.18 0 bottom
U$51  [MONITOR0]  26.42,43.18 0 bottom
U$52  [PULSE0]  32.51,45.21 0 bottom
U$53  [AND0]  27.18,44.2 0 bottom
U$54  [SFE_LOGO_FLAME_.1]  13.72,37.34 0 bottom
U$55  [#RST0]  11.68,44.66 0 bottom
U$56  [SCL0]  11.86,42.11 0 bottom
U$57  [SDA0]  12.03,39.59 0 bottom
U$58  [#RST0]  8.42,44.68 0 top
U$59  [GND-03]  8.45,34.5 0 top
U$60  [SDA0]  8.54,39.57 0 top
U$61  PAM2401  [MSOP8]  53.34,14.22 180 top
U$62  [I_SUPER2_C-()-03]  57.15,15.24 270 bottom
U$63  [GND-03]  38.64,8.11 0 bottom
U$64  [SCL0]  34.44,15.69 0 top
U$65  [MFIO0]  39.35,17.93 270 bottom
U$66  [GND-03]  34.39,8.11 180 bottom
U$67  [3V3-03]  38.44,10.64 0 bottom
U$68  [3V3-TEXT]  34.38,10.7 0 top
U$69  [OXIMETER0]  58.42,17.78 0 bottom
U$70  [HEART_RATE0]  58.42,16.76 0 bottom
U$71  [MONITOR0]  52.32,16.76 0 bottom
U$72  [PULSE0]  58.42,18.8 0 bottom
U$73  [AND0]  53.09,17.78 0 bottom
U$74  [SFE_LOGO_FLAME_.1]  39.62,10.92 0 bottom
U$75  [#RST0]  37.59,18.24 0 bottom
U$76  [SCL0]  37.77,15.69 0 bottom
U$77  [SDA0]  37.94,13.17 0 bottom
U$78  [#RST0]  34.32,18.27 0 top
U$79  [GND-03]  34.36,8.08 0 top
U$80  [SDA0]  34.45,13.15 0 top
U$81  PAM2401  [MSOP8]  53.34,27.43 180 top
U$82  [I_SUPER2_C-()-03]  57.15,28.45 270 bottom
U$83  [GND-03]  38.64,21.32 0 bottom
U$84  [SCL0]  34.44,28.9 0 top
U$85  [MFIO0]  39.35,31.14 270 bottom
U$86  [GND-03]  34.39,21.32 180 bottom
U$87  [3V3-03]  38.44,23.85 0 bottom
U$88  [3V3-TEXT]  34.38,23.91 0 top
U$89  [OXIMETER0]  58.42,30.99 0 bottom
U$90  [HEART_RATE0]  58.42,29.97 0 bottom
U$91  [MONITOR0]  52.32,29.97 0 bottom
U$92  [PULSE0]  58.42,32 0 bottom
U$93  [AND0]  53.09,30.99 0 bottom
U$94  [SFE_LOGO_FLAME_.1]  39.62,24.13 0 bottom
U$95  [#RST0]  37.59,31.45 0 bottom
U$96  [SCL0]  37.77,28.9 0 bottom
U$97  [SDA0]  37.94,26.38 0 bottom
U$98  [#RST0]  34.32,31.47 0 top
U$99  [GND-03]  34.36,21.29 0 top
U$100  [SDA0]  34.45,26.36 0 top
U$101  PAM2401  [MSOP8]  53.34,40.64 180 top
U$102  [I_SUPER2_C-()-03]  57.15,41.66 270 bottom
U$103  [GND-03]  38.64,34.52 0 bottom
U$104  [SCL0]  34.44,42.11 0 top
U$105  [MFIO0]  39.35,44.35 270 bottom
U$106  [GND-03]  34.39,34.53 180 bottom
U$107  [3V3-03]  38.44,37.06 0 bottom
U$108  [3V3-TEXT]  34.38,37.11 0 top
U$109  [OXIMETER0]  58.42,44.2 0 bottom
U$110  [HEART_RATE0]  58.42,43.18 0 bottom
U$111  [MONITOR0]  52.32,43.18 0 bottom
U$112  [PULSE0]  58.42,45.21 0 bottom
U$113  [AND0]  53.09,44.2 0 bottom
U$114  [SFE_LOGO_FLAME_.1]  39.62,37.34 0 bottom
U$115  [#RST0]  37.59,44.66 0 bottom
U$116  [SCL0]  37.77,42.11 0 bottom
U$117  [SDA0]  37.94,39.59 0 bottom
U$118  [#RST0]  34.32,44.68 0 top
U$119  [GND-03]  34.36,34.5 0 top
U$120  [SDA0]  34.45,39.57 0 top
U$121  PAM2401  [MSOP8]  79.25,14.22 180 top
U$122  [I_SUPER2_C-()-03]  83.06,15.24 270 bottom
U$123  [GND-03]  64.55,8.11 0 bottom
U$124  [SCL0]  60.35,15.69 0 top
U$125  [MFIO0]  65.26,17.93 270 bottom
U$126  [GND-03]  60.3,8.11 180 bottom
U$127  [3V3-03]  64.35,10.64 0 bottom
U$128  [3V3-TEXT]  60.28,10.7 0 top
U$129  [OXIMETER0]  84.33,17.78 0 bottom
U$130  [HEART_RATE0]  84.33,16.76 0 bottom
U$131  [MONITOR0]  78.23,16.76 0 bottom
U$132  [PULSE0]  84.33,18.8 0 bottom
U$133  [AND0]  78.99,17.78 0 bottom
U$134  [SFE_LOGO_FLAME_.1]  65.53,10.92 0 bottom
U$135  [#RST0]  63.49,18.24 0 bottom
U$136  [SCL0]  63.68,15.69 0 bottom
U$137  [SDA0]  63.85,13.17 0 bottom
U$138  [#RST0]  60.23,18.27 0 top
U$139  [GND-03]  60.27,8.08 0 top
U$140  [SDA0]  60.36,13.15 0 top
U$141  PAM2401  [MSOP8]  79.25,27.43 180 top
U$142  [I_SUPER2_C-()-03]  83.06,28.45 270 bottom
U$143  [GND-03]  64.55,21.32 0 bottom
U$144  [SCL0]  60.35,28.9 0 top
U$145  [MFIO0]  65.26,31.14 270 bottom
U$146  [GND-03]  60.3,21.32 180 bottom
U$147  [3V3-03]  64.35,23.85 0 bottom
U$148  [3V3-TEXT]  60.28,23.91 0 top
U$149  [OXIMETER0]  84.33,30.99 0 bottom
U$150  [HEART_RATE0]  84.33,29.97 0 bottom
U$151  [MONITOR0]  78.23,29.97 0 bottom
U$152  [PULSE0]  84.33,32 0 bottom
U$153  [AND0]  78.99,30.99 0 bottom
U$154  [SFE_LOGO_FLAME_.1]  65.53,24.13 0 bottom
U$155  [#RST0]  63.49,31.45 0 bottom
U$156  [SCL0]  63.68,28.9 0 bottom
U$157  [SDA0]  63.85,26.38 0 bottom
U$158  [#RST0]  60.23,31.47 0 top
U$159  [GND-03]  60.27,21.29 0 top
U$160  [SDA0]  60.36,26.36 0 top
U$161  PAM2401  [MSOP8]  79.25,40.64 180 top
U$162  [I_SUPER2_C-()-03]  83.06,41.66 270 bottom
U$163  [GND-03]  64.55,34.52 0 bottom
U$164  [SCL0]  60.35,42.11 0 top
U$165  [MFIO0]  65.26,44.35 270 bottom
U$166  [GND-03]  60.3,34.53 180 bottom
U$167  [3V3-03]  64.35,37.06 0 bottom
U$168  [3V3-TEXT]  60.28,37.11 0 top
U$169  [OXIMETER0]  84.33,44.2 0 bottom
U$170  [HEART_RATE0]  84.33,43.18 0 bottom
U$171  [MONITOR0]  78.23,43.18 0 bottom
U$172  [PULSE0]  84.33,45.21 0 bottom
U$173  [AND0]  78.99,44.2 0 bottom
U$174  [SFE_LOGO_FLAME_.1]  65.53,37.34 0 bottom
U$175  [#RST0]  63.49,44.66 0 bottom
U$176  [SCL0]  63.68,42.11 0 bottom
U$177  [SDA0]  63.85,39.59 0 bottom
U$178  [#RST0]  60.23,44.68 0 top
U$179  [GND-03]  60.27,34.5 0 top
U$180  [SDA0]  60.36,39.57 0 top
U$181  PAM2401  [MSOP8]  105.16,14.22 180 top
U$182  [I_SUPER2_C-()-03]  108.97,15.24 270 bottom
U$183  [GND-03]  90.46,8.11 0 bottom
U$184  [SCL0]  86.26,15.69 0 top
U$185  [MFIO0]  91.17,17.93 270 bottom
U$186  [GND-03]  86.21,8.11 180 bottom
U$187  [3V3-03]  90.25,10.64 0 bottom
U$188  [3V3-TEXT]  86.19,10.7 0 top
U$189  [OXIMETER0]  110.24,17.78 0 bottom
U$190  [HEART_RATE0]  110.24,16.76 0 bottom
U$191  [MONITOR0]  104.14,16.76 0 bottom
U$192  [PULSE0]  110.24,18.8 0 bottom
U$193  [AND0]  104.9,17.78 0 bottom
U$194  [SFE_LOGO_FLAME_.1]  91.44,10.92 0 bottom
U$195  [#RST0]  89.4,18.24 0 bottom
U$196  [SCL0]  89.58,15.69 0 bottom
U$197  [SDA0]  89.76,13.17 0 bottom
U$198  [#RST0]  86.14,18.27 0 top
U$199  [GND-03]  86.18,8.08 0 top
U$200  [SDA0]  86.27,13.15 0 top
U$201  PAM2401  [MSOP8]  105.16,27.43 180 top
U$202  [I_SUPER2_C-()-03]  108.97,28.45 270 bottom
U$203  [GND-03]  90.46,21.32 0 bottom
U$204  [SCL0]  86.26,28.9 0 top
U$205  [MFIO0]  91.17,31.14 270 bottom
U$206  [GND-03]  86.21,21.32 180 bottom
U$207  [3V3-03]  90.25,23.85 0 bottom
U$208  [3V3-TEXT]  86.19,23.91 0 top
U$209  [OXIMETER0]  110.24,30.99 0 bottom
U$210  [HEART_RATE0]  110.24,29.97 0 bottom
U$211  [MONITOR0]  104.14,29.97 0 bottom
U$212  [PULSE0]  110.24,32 0 bottom
U$213  [AND0]  104.9,30.99 0 bottom
U$214  [SFE_LOGO_FLAME_.1]  91.44,24.13 0 bottom
U$215  [#RST0]  89.4,31.45 0 bottom
U$216  [SCL0]  89.58,28.9 0 bottom
U$217  [SDA0]  89.76,26.38 0 bottom
U$218  [#RST0]  86.14,31.47 0 top
U$219  [GND-03]  86.18,21.29 0 top
U$220  [SDA0]  86.27,26.36 0 top
U$221  PAM2401  [MSOP8]  105.16,40.64 180 top
U$222  [I_SUPER2_C-()-03]  108.97,41.66 270 bottom
U$223  [GND-03]  90.46,34.52 0 bottom
U$224  [SCL0]  86.26,42.11 0 top
U$225  [MFIO0]  91.17,44.35 270 bottom
U$226  [GND-03]  86.21,34.53 180 bottom
U$227  [3V3-03]  90.25,37.06 0 bottom
U$228  [3V3-TEXT]  86.19,37.11 0 top
U$229  [OXIMETER0]  110.24,44.2 0 bottom
U$230  [HEART_RATE0]  110.24,43.18 0 bottom
U$231  [MONITOR0]  104.14,43.18 0 bottom
U$232  [PULSE0]  110.24,45.21 0 bottom
U$233  [AND0]  104.9,44.2 0 bottom
U$234  [SFE_LOGO_FLAME_.1]  91.44,37.34 0 bottom
U$235  [#RST0]  89.4,44.66 0 bottom
U$236  [SCL0]  89.58,42.11 0 bottom
U$237  [SDA0]  89.76,39.59 0 bottom
U$238  [#RST0]  86.14,44.68 0 top
U$239  [GND-03]  86.18,34.5 0 top
U$240  [SDA0]  86.27,39.57 0 top
U$241  PAM2401  [MSOP8]  27.43,53.85 180 top
U$242  [I_SUPER2_C-()-03]  31.24,54.86 270 bottom
U$243  [GND-03]  12.74,47.73 0 bottom
U$244  [SCL0]  8.54,55.31 0 top
U$245  [MFIO0]  13.45,57.56 270 bottom
U$246  [GND-03]  8.48,47.73 180 bottom
U$247  [3V3-03]  12.53,50.27 0 bottom
U$248  [3V3-TEXT]  8.47,50.32 0 top
U$249  [OXIMETER0]  32.51,57.4 0 bottom
U$250  [HEART_RATE0]  32.51,56.39 0 bottom
U$251  [MONITOR0]  26.42,56.39 0 bottom
U$252  [PULSE0]  32.51,58.42 0 bottom
U$253  [AND0]  27.18,57.4 0 bottom
U$254  [SFE_LOGO_FLAME_.1]  13.72,50.55 0 bottom
U$255  [#RST0]  11.68,57.86 0 bottom
U$256  [SCL0]  11.86,55.31 0 bottom
U$257  [SDA0]  12.03,52.79 0 bottom
U$258  [#RST0]  8.42,57.89 0 top
U$259  [GND-03]  8.45,47.71 0 top
U$260  [SDA0]  8.54,52.78 0 top
U$261  PAM2401  [MSOP8]  53.34,53.85 180 top
U$262  [I_SUPER2_C-()-03]  57.15,54.86 270 bottom
U$263  [GND-03]  38.64,47.73 0 bottom
U$264  [SCL0]  34.44,55.31 0 top
U$265  [MFIO0]  39.35,57.56 270 bottom
U$266  [GND-03]  34.39,47.73 180 bottom
U$267  [3V3-03]  38.44,50.27 0 bottom
U$268  [3V3-TEXT]  34.38,50.32 0 top
U$269  [OXIMETER0]  58.42,57.4 0 bottom
U$270  [HEART_RATE0]  58.42,56.39 0 bottom
U$271  [MONITOR0]  52.32,56.39 0 bottom
U$272  [PULSE0]  58.42,58.42 0 bottom
U$273  [AND0]  53.09,57.4 0 bottom
U$274  [SFE_LOGO_FLAME_.1]  39.62,50.55 0 bottom
U$275  [#RST0]  37.59,57.86 0 bottom
U$276  [SCL0]  37.77,55.31 0 bottom
U$277  [SDA0]  37.94,52.79 0 bottom
U$278  [#RST0]  34.32,57.89 0 top
U$279  [GND-03]  34.36,47.71 0 top
U$280  [SDA0]  34.45,52.78 0 top
U$281  PAM2401  [MSOP8]  79.25,53.85 180 top
U$282  [I_SUPER2_C-()-03]  83.06,54.86 270 bottom
U$283  [GND-03]  64.55,47.73 0 bottom
U$284  [SCL0]  60.35,55.31 0 top
U$285  [MFIO0]  65.26,57.56 270 bottom
U$286  [GND-03]  60.3,47.73 180 bottom
U$287  [3V3-03]  64.35,50.27 0 bottom
U$288  [3V3-TEXT]  60.28,50.32 0 top
U$289  [OXIMETER0]  84.33,57.4 0 bottom
U$290  [HEART_RATE0]  84.33,56.39 0 bottom
U$291  [MONITOR0]  78.23,56.39 0 bottom
U$292  [PULSE0]  84.33,58.42 0 bottom
U$293  [AND0]  78.99,57.4 0 bottom
U$294  [SFE_LOGO_FLAME_.1]  65.53,50.55 0 bottom
U$295  [#RST0]  63.49,57.86 0 bottom
U$296  [SCL0]  63.68,55.31 0 bottom
U$297  [SDA0]  63.85,52.79 0 bottom
U$298  [#RST0]  60.23,57.89 0 top
U$299  [GND-03]  60.27,47.71 0 top
U$300  [SDA0]  60.36,52.78 0 top
U$301  PAM2401  [MSOP8]  105.16,53.85 180 top
U$302  [I_SUPER2_C-()-03]  108.97,54.86 270 bottom
U$303  [GND-03]  90.46,47.73 0 bottom
U$304  [SCL0]  86.26,55.31 0 top
U$305  [MFIO0]  91.17,57.56 270 bottom
U$306  [GND-03]  86.21,47.73 180 bottom
U$307  [3V3-03]  90.25,50.27 0 bottom
U$308  [3V3-TEXT]  86.19,50.32 0 top
U$309  [OXIMETER0]  110.24,57.4 0 bottom
U$310  [HEART_RATE0]  110.24,56.39 0 bottom
U$311  [MONITOR0]  104.14,56.39 0 bottom
U$312  [PULSE0]  110.24,58.42 0 bottom
U$313  [AND0]  104.9,57.4 0 bottom
U$314  [SFE_LOGO_FLAME_.1]  91.44,50.55 0 bottom
U$315  [#RST0]  89.4,57.86 0 bottom
U$316  [SCL0]  89.58,55.31 0 bottom
U$317  [SDA0]  89.76,52.79 0 bottom
U$318  [#RST0]  86.14,57.89 0 top
U$319  [GND-03]  86.18,47.71 0 top
U$320  [SDA0]  86.27,52.78 0 top
U$321  PAM2401  [MSOP8]  131.06,14.22 180 top
U$322  [I_SUPER2_C-()-03]  134.87,15.24 270 bottom
U$323  [GND-03]  116.37,8.11 0 bottom
U$324  [SCL0]  112.17,15.69 0 top
U$325  [MFIO0]  117.08,17.93 270 bottom
U$326  [GND-03]  112.12,8.11 180 bottom
U$327  [3V3-03]  116.16,10.64 0 bottom
U$328  [3V3-TEXT]  112.1,10.7 0 top
U$329  [OXIMETER0]  136.14,17.78 0 bottom
U$330  [HEART_RATE0]  136.14,16.76 0 bottom
U$331  [MONITOR0]  130.05,16.76 0 bottom
U$332  [PULSE0]  136.14,18.8 0 bottom
U$333  [AND0]  130.81,17.78 0 bottom
U$334  [SFE_LOGO_FLAME_.1]  117.35,10.92 0 bottom
U$335  [#RST0]  115.31,18.24 0 bottom
U$336  [SCL0]  115.49,15.69 0 bottom
U$337  [SDA0]  115.67,13.17 0 bottom
U$338  [#RST0]  112.05,18.27 0 top
U$339  [GND-03]  112.09,8.08 0 top
U$340  [SDA0]  112.17,13.15 0 top
U$341  PAM2401  [MSOP8]  131.06,27.43 180 top
U$342  [I_SUPER2_C-()-03]  134.87,28.45 270 bottom
U$343  [GND-03]  116.37,21.32 0 bottom
U$344  [SCL0]  112.17,28.9 0 top
U$345  [MFIO0]  117.08,31.14 270 bottom
U$346  [GND-03]  112.12,21.32 180 bottom
U$347  [3V3-03]  116.16,23.85 0 bottom
U$348  [3V3-TEXT]  112.1,23.91 0 top
U$349  [OXIMETER0]  136.14,30.99 0 bottom
U$350  [HEART_RATE0]  136.14,29.97 0 bottom
U$351  [MONITOR0]  130.05,29.97 0 bottom
U$352  [PULSE0]  136.14,32 0 bottom
U$353  [AND0]  130.81,30.99 0 bottom
U$354  [SFE_LOGO_FLAME_.1]  117.35,24.13 0 bottom
U$355  [#RST0]  115.31,31.45 0 bottom
U$356  [SCL0]  115.49,28.9 0 bottom
U$357  [SDA0]  115.67,26.38 0 bottom
U$358  [#RST0]  112.05,31.47 0 top
U$359  [GND-03]  112.09,21.29 0 top
U$360  [SDA0]  112.17,26.36 0 top
U$361  PAM2401  [MSOP8]  131.06,40.64 180 top
U$362  [I_SUPER2_C-()-03]  134.87,41.66 270 bottom
U$363  [GND-03]  116.37,34.52 0 bottom
U$364  [SCL0]  112.17,42.11 0 top
U$365  [MFIO0]  117.08,44.35 270 bottom
U$366  [GND-03]  112.12,34.53 180 bottom
U$367  [3V3-03]  116.16,37.06 0 bottom
U$368  [3V3-TEXT]  112.1,37.11 0 top
U$369  [OXIMETER0]  136.14,44.2 0 bottom
U$370  [HEART_RATE0]  136.14,43.18 0 bottom
U$371  [MONITOR0]  130.05,43.18 0 bottom
U$372  [PULSE0]  136.14,45.21 0 bottom
U$373  [AND0]  130.81,44.2 0 bottom
U$374  [SFE_LOGO_FLAME_.1]  117.35,37.34 0 bottom
U$375  [#RST0]  115.31,44.66 0 bottom
U$376  [SCL0]  115.49,42.11 0 bottom
U$377  [SDA0]  115.67,39.59 0 bottom
U$378  [#RST0]  112.05,44.68 0 top
U$379  [GND-03]  112.09,34.5 0 top
U$380  [SDA0]  112.17,39.57 0 top
U$381  PAM2401  [MSOP8]  131.06,53.85 180 top
U$382  [I_SUPER2_C-()-03]  134.87,54.86 270 bottom
U$383  [GND-03]  116.37,47.73 0 bottom
U$384  [SCL0]  112.17,55.31 0 top
U$385  [MFIO0]  117.08,57.56 270 bottom
U$386  [GND-03]  112.12,47.73 180 bottom
U$387  [3V3-03]  116.16,50.27 0 bottom
U$388  [3V3-TEXT]  112.1,50.32 0 top
U$389  [OXIMETER0]  136.14,57.4 0 bottom
U$390  [HEART_RATE0]  136.14,56.39 0 bottom
U$391  [MONITOR0]  130.05,56.39 0 bottom
U$392  [PULSE0]  136.14,58.42 0 bottom
U$393  [AND0]  130.81,57.4 0 bottom
U$394  [SFE_LOGO_FLAME_.1]  117.35,50.55 0 bottom
U$395  [#RST0]  115.31,57.86 0 bottom
U$396  [SCL0]  115.49,55.31 0 bottom
U$397  [SDA0]  115.67,52.79 0 bottom
U$398  [#RST0]  112.05,57.89 0 top
U$399  [GND-03]  112.09,47.71 0 top
U$400  [SDA0]  112.17,52.78 0 top
Y1  32.768kHz  [CRYSTAL-SMD-3.2X1.5MM]  13.44,10.67 180 top
Y2  32.768kHz  [CRYSTAL-SMD-3.2X1.5MM]  13.44,23.88 180 top
Y3  32.768kHz  [CRYSTAL-SMD-3.2X1.5MM]  13.44,37.08 180 top
Y4  32.768kHz  [CRYSTAL-SMD-3.2X1.5MM]  39.34,10.67 180 top
Y5  32.768kHz  [CRYSTAL-SMD-3.2X1.5MM]  39.34,23.88 180 top
Y6  32.768kHz  [CRYSTAL-SMD-3.2X1.5MM]  39.34,37.08 180 top
Y7  32.768kHz  [CRYSTAL-SMD-3.2X1.5MM]  65.25,10.67 180 top
Y8  32.768kHz  [CRYSTAL-SMD-3.2X1.5MM]  65.25,23.88 180 top
Y9  32.768kHz  [CRYSTAL-SMD-3.2X1.5MM]  65.25,37.08 180 top
Y10  32.768kHz  [CRYSTAL-SMD-3.2X1.5MM]  91.16,10.67 180 top
Y11  32.768kHz  [CRYSTAL-SMD-3.2X1.5MM]  91.16,23.88 180 top
Y12  32.768kHz  [CRYSTAL-SMD-3.2X1.5MM]  91.16,37.08 180 top
Y13  32.768kHz  [CRYSTAL-SMD-3.2X1.5MM]  13.44,50.29 180 top
Y14  32.768kHz  [CRYSTAL-SMD-3.2X1.5MM]  39.34,50.29 180 top
Y15  32.768kHz  [CRYSTAL-SMD-3.2X1.5MM]  65.25,50.29 180 top
Y16  32.768kHz  [CRYSTAL-SMD-3.2X1.5MM]  91.16,50.29 180 top
Y17  32.768kHz  [CRYSTAL-SMD-3.2X1.5MM]  117.07,10.67 180 top
Y18  32.768kHz  [CRYSTAL-SMD-3.2X1.5MM]  117.07,23.88 180 top
Y19  32.768kHz  [CRYSTAL-SMD-3.2X1.5MM]  117.07,37.08 180 top
Y20  32.768kHz  [CRYSTAL-SMD-3.2X1.5MM]  117.07,50.29 180 top